# EAGLE board HW2_Brian Burton_u1038667 (EAGLE 9.6.2)
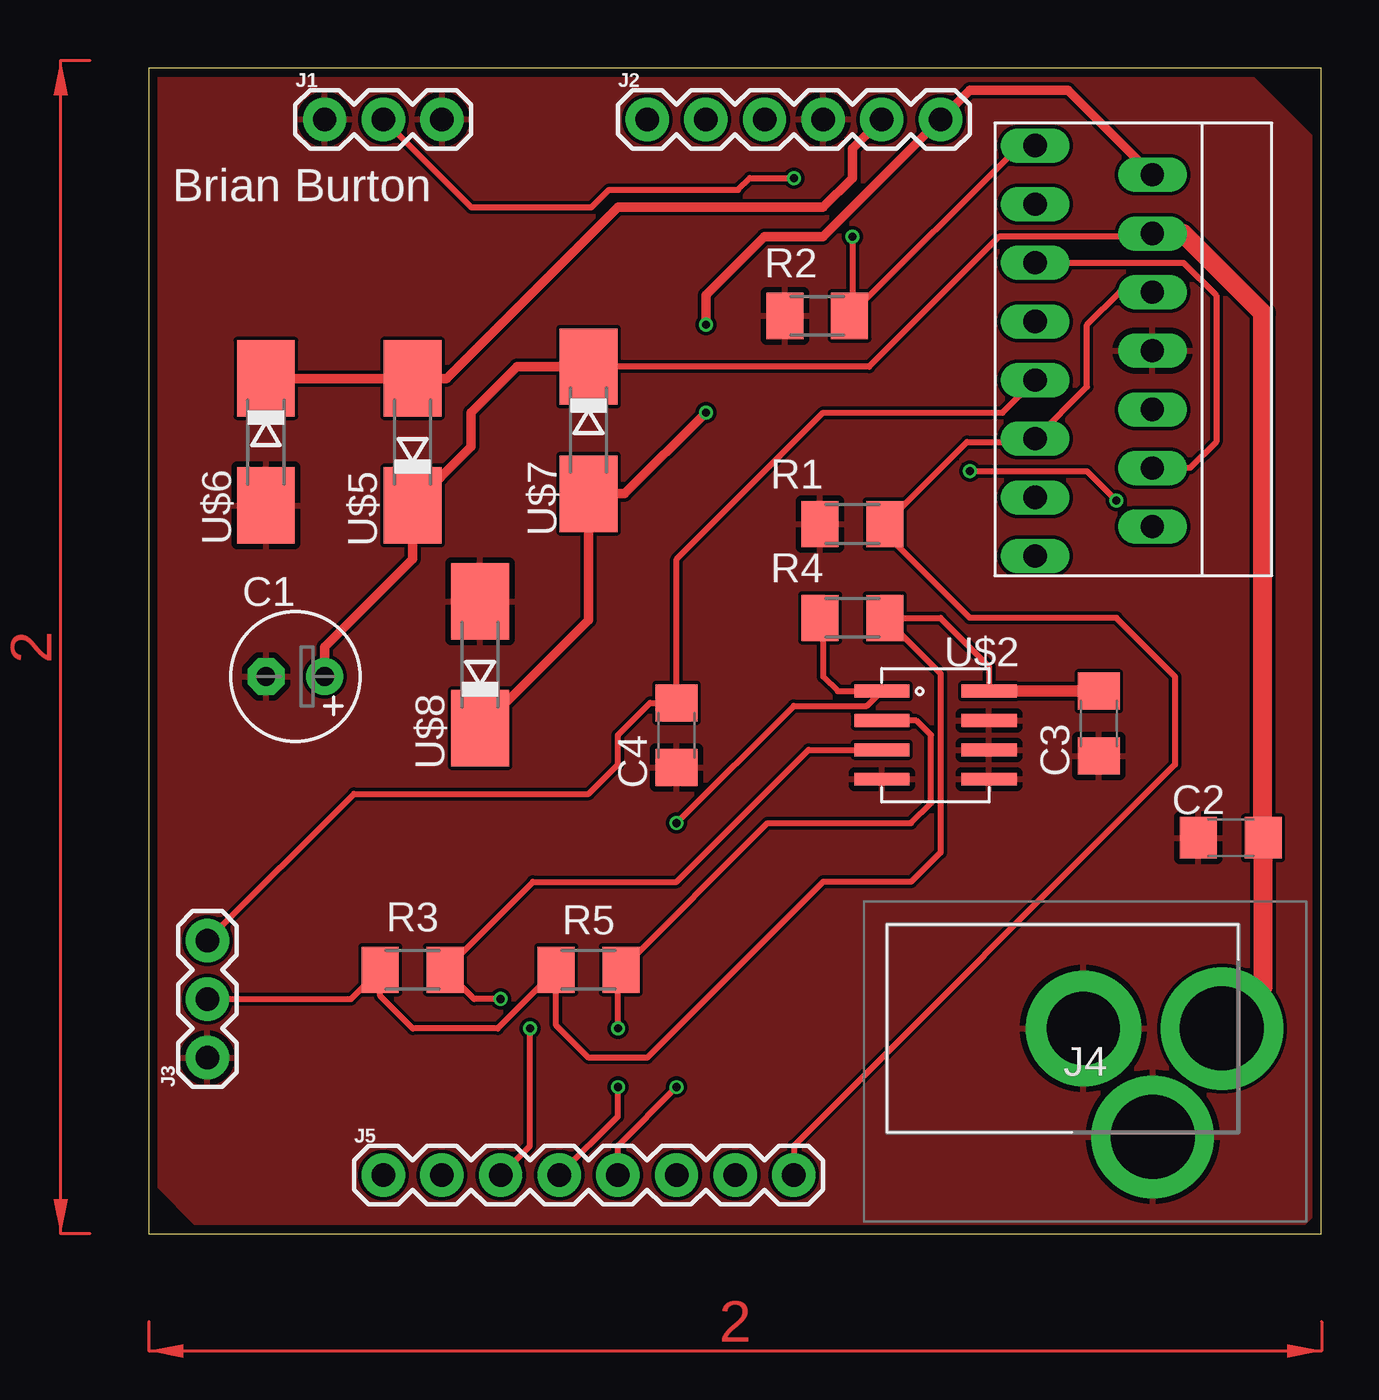
[diagram p0: board, top side]
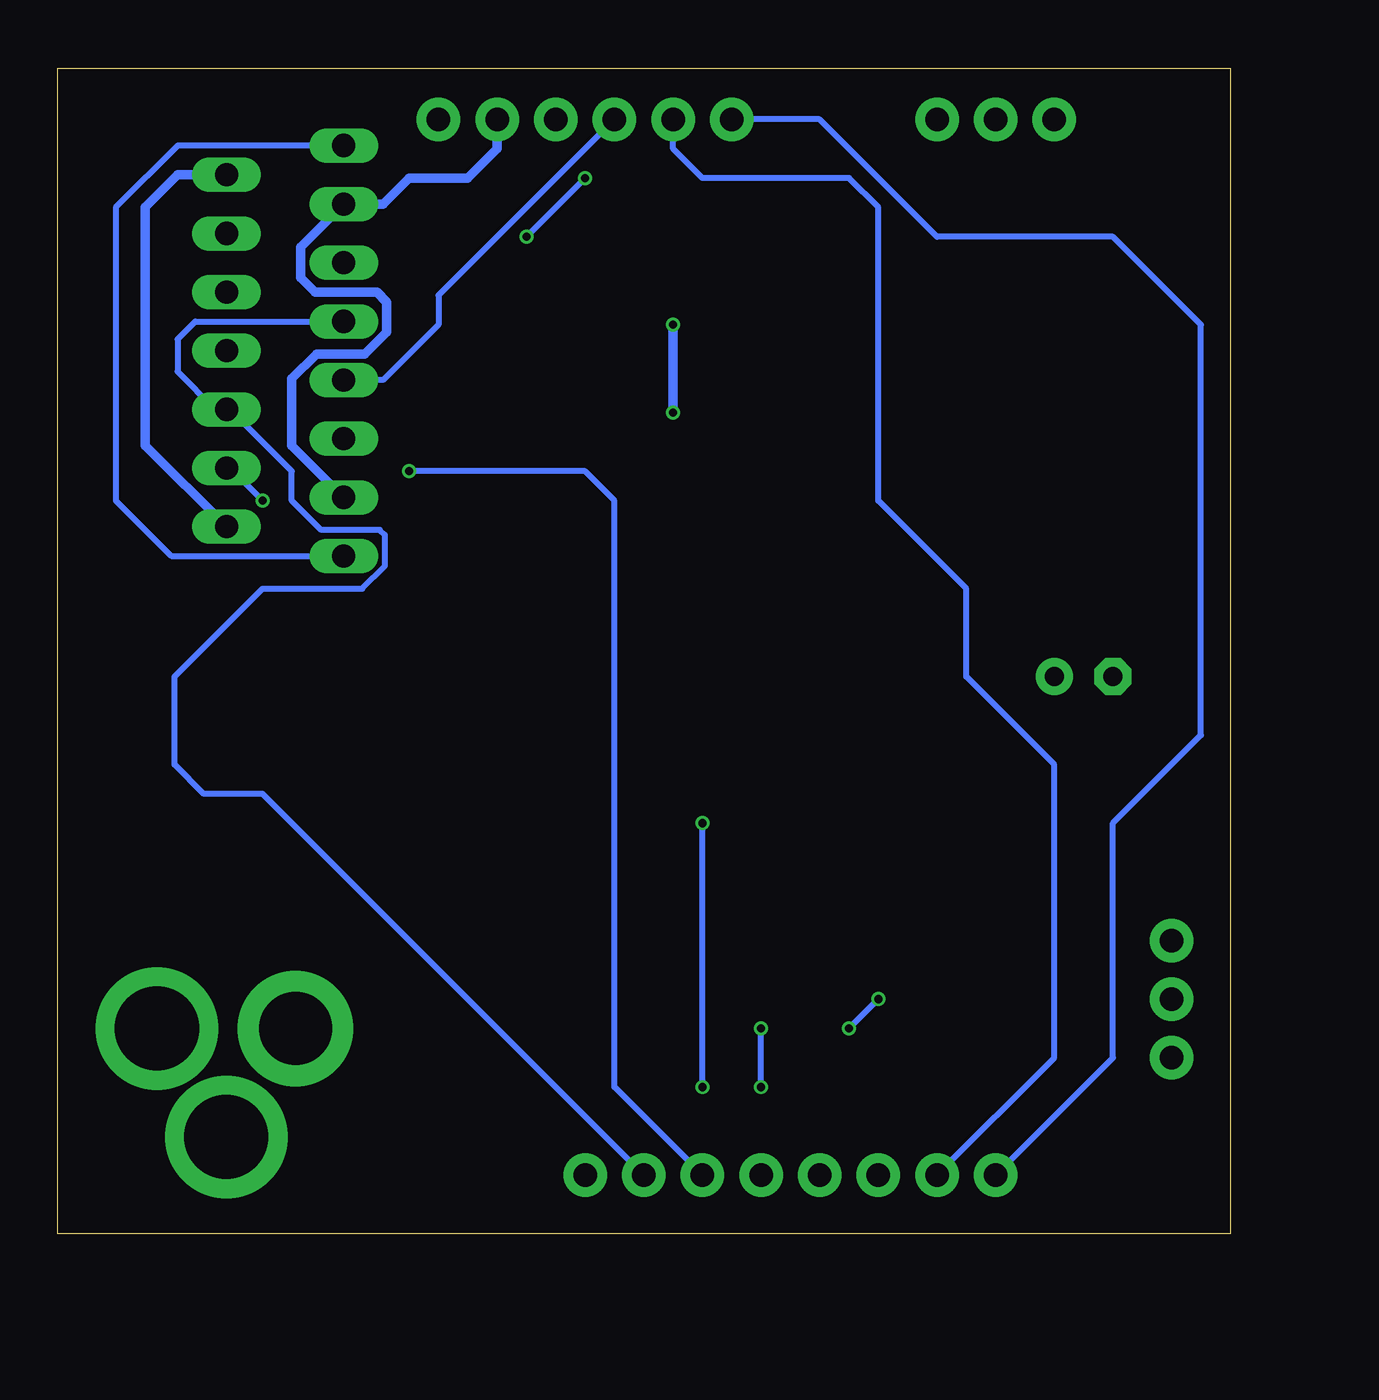
[diagram p1: board, bottom side, seen from below]

Size 50.78 x 50.47 mm. Coordinates in mm from the lower left corner, seen from the top.
Outline: 0,0 50.78,0 50.78,50.47 0,50.47 0,0
Copper layers (1*16): Top 0.035559375mm / dielectric 1.6mm / Bottom 0.035559375mm
Design rules "oshpark-2layer": minimum track width 6mil, minimum drill 10mil, track to track 6mil, track to pad 6mil, pad to pad 6mil, via to via 6mil, smd to smd 6mil, copper to edge 15mil, drill to drill 6mil, minimum pad ring 5mil, minimum via ring 5mil, stop-mask expansion 2.5mil, vias tented up to drill 0mil, thermal gap 10mil

## Footprints (pad centres in the part's own frame; a part is rotated, then mirrored left to right if it is on the bottom)
E2,5-6 = drill 0.813 pad 1.6: + -1.27,0 | drill 0.813 pad 1.6 octagon: - 1.27,0
C1206 = smd 1.6 x 1.8: 1 -1.4,0; 2 1.4,0
1X03 = drill 1.016 pad 1.88: 1 0,0; 2 2.54,0; 3 5.08,0
1X06 = drill 1.016 pad 1.88: 1 0,0; 2 2.54,0; 3 5.08,0; 4 7.62,0; 5 10.16,0; 6 12.7,0
CONSOCJ2155 = drill 3.64 pad 5.3: 1 0,0; 3 -3,-4.7 | drill 3.162 pad 5: 2 -6,0
1X08 = drill 1.016 pad 1.88: 1 0,0; 2 2.54,0; 3 5.08,0; 4 7.62,0; 5 10.16,0; 6 12.7,0; 7 15.24,0; 8 17.78,0
M1206 = smd 1.6 x 2: 1 -1.4,0; 2 1.4,0
L298N-MULTIWATT15 = drill 1 pad 1.2 long: 1 9.03,2.25; 2 7.76,-2.83; 3 6.49,2.25; 4 5.22,-2.83; 5 3.95,2.25; 6 2.68,-2.83; 7 1.41,2.25; 8 0.14,-2.83; 9 -1.13,2.25; 10 -2.4,-2.83; 11 -3.67,2.25; 12 -4.94,-2.83; 13 -6.21,2.25; 14 -7.48,-2.83; 15 -8.75,2.25
SOIC-8 = smd 2.388 x 0.559: 1 -2.54,1.905; 2 -2.54,0.635; 3 -2.54,-0.635; 4 -2.54,-1.905; 5 2.108,-1.905; 6 2.108,-0.635; 7 2.108,0.635; 8 2.108,1.905
SOD106A-W = smd 3.303 x 2.5: A 2.75,0; C -2.75,0

## Placement (x,y rotation side)
C1  1uF  [E2,5-6]  6.35,24.13 180 top
C2  100nF  [C1206]  46.86,17.14 180 top
C3  100nF  [C1206]  41.15,22.1 270 top
C4  100nF  [C1206]  22.86,21.59 270 top
J1  [1X03]  7.62,48.26 0 top
J2  MTR_CTRL  [1X06]  21.59,48.26 0 top
J3  MCU PWR  [1X03]  2.54,7.62 90 top
J4  CON-SOCJ-2155  [CONSOCJ2155]  46.48,8.89 0 top
J5  [1X08]  10.16,2.54 0 top
R1  10K  [M1206]  30.48,30.73 0 top
R2  0.04  [M1206]  28.96,39.75 180 top
R3  10K  [M1206]  11.43,11.43 180 top
R4  10K  [M1206]  30.48,26.67 0 top
R5  10K  [M1206]  19.05,11.43 180 top
U$1  L298N-MULTIWATT15  [L298N-MULTIWATT15]  40.64,38.1 90 top
U$2  LM75A-SOIC8  [SOIC-8]  34.29,21.59 0 top
U$5  SS14CT-ND  [SOD106A-W]  11.43,34.29 90 top
U$6  SS14CT-ND  [SOD106A-W]  5.08,34.29 270 top
U$7  SS14CT-ND  [SOD106A-W]  19.05,34.8 270 top
U$8  SS14CT-ND  [SOD106A-W]  14.35,24.64 90 top

## Library data of the parts
C1-C4 = rcl; SPICEPREFIX: C
J1 J3 = SparkFun-Connectors
J2 = SparkFun-Connectors; PROD_ID: CONN-08437
J4 = SamacSys_Parts; DESCRIPTION: DC Power Connectors Power Jack/Connector 2.1mm x 5.5mm; HEIGHT: 11mm; MANUFACTURER_NAME: Gravitech; MANUFACTURER_PART_NUMBER: CON-SOCJ-2155; MOUSER_PART_NUMBER: 992-CON-SOCJ-2155; MOUSER_PRICE-STOCK: https://www.mouser.co.uk/ProductDetail/Gravitech/CON-SOCJ-2155/?qs=fkzBJ5HM%252BdCcpvFQyQZHtA%3D%3D
J5 = SparkFun-Connectors; PROD_ID: CONN-08438
R1-R5 = rcl; SPICEPREFIX: R
U$1 = ECE5780-MotorDriver
U$2 U$5-U$8 = L298_Motor_Driver_Lib_ECE5780

## Nets
3.3V: C3.1 J3.2 R3.2 R4.2 R5.2 U$2.8
5V: C4.1 J2.3 J3.3 U$1.9
CS: J1.2 R2.1 U$1.1 U$1.15
ENABLE: J5.8 R1.2 U$1.6 U$1.11
ENC_A: J2.2 J5.2
ENC_B: J2.1 J5.1
GND: C1.- C2.2 C3.2 C4.2 J1.1 J1.3 J2.4 J3.1 J4.2 J4.3 R1.1 R2.2 U$1.8 U$2.4 U$2.5 U$2.6 U$2.7 U$6.A U$8.A
IN_1: J5.7 U$1.7 U$1.10
IN_2: J5.6 U$1.5 U$1.12
MTR_BLK: J2.5 U$1.3 U$1.13 U$5.A U$6.C
MTR_RED: J2.6 U$1.2 U$1.14 U$7.A U$8.C
O.S.: J5.3 R3.1 U$2.3
SCL: J5.4 R5.1 U$2.2
SDA: J5.5 R4.1 U$2.1
VCC: C1.+ C2.1 J4.1 U$1.4 U$5.C U$7.C

## Tracks (layer width: path | path; a pad name or v marks a point on that pad's centre or on a via)
3.3V
  Top 0.254: J3.2 8.76,10.16 R3.2 10.03,10.29 11.43,8.89 15.11,8.89 R5.2 17.65,9.02 19.05,7.62 21.59,7.62 29.21,15.24 33.02,15.24 34.29,16.51 34.29,24.26 R4.2 34.29,26.67 36.4,24.56 U$2.8
  Top 0.508: U$2.8 C3.1
5V
  Top 0.254: U$1.9 36.98,35.56 29.21,35.56 22.86,29.21 C4.1 21.72,22.99 20.32,21.59 20.32,20.32 19.05,19.05 8.89,19.05 J3.3
  Bottom 0.254: J2.3 34.29,40.64 34.29,39.37 36.69,36.97 U$1.9
CS  (via drill 0.35)
  Top 0.254: U$1.1 37.73,47.13 R2.1 30.48,39.88 v30.48,43.18 | J1.2 13.97,44.45 19.18,44.45 19.94,45.21 25.53,45.21 26.04,45.72 v27.94,45.72
  Bottom 0.254: U$1.1 45.58,47.13 48.26,44.45 48.26,31.75 45.86,29.35 U$1.15 | v27.94,45.72 v30.48,43.18
ENABLE
  Top 0.254: U$1.6 42.05,40.78 40.64,39.37 40.64,36.68 U$1.11 38.25,34.29 35.44,34.29 R1.2 31.88,30.35 35.56,26.67 41.91,26.67 44.45,24.13 44.45,20.32 27.94,3.81 J5.8
ENC_A
  Bottom 0.254: J5.2 7.62,7.62 7.62,20.32 11.43,24.13 11.43,27.94 15.24,31.75 15.24,44.45 16.51,45.72 22.86,45.72 24.13,46.99 J2.2
ENC_B
  Bottom 0.254: J5.1 5.08,7.62 5.08,17.78 1.27,21.59 1.27,39.37 5.08,43.18 12.7,43.18 17.78,48.26 J2.1
GND
  pour Top: 0,49.53 0,2.54 2.54,0 49.53,0 50.8,1.27 50.8,46.99 46.99,50.8 1.27,50.8
IN_1
  Bottom 0.254: U$1.7 44.82,39.51 45.59,38.73 45.59,37.34 43.95,35.7 U$1.10 43.32,35.7 40.64,33.02 40.64,31.75 39.37,30.48 36.83,30.48 36.61,30.26 36.61,28.92 37.59,27.94 41.91,27.94 45.72,24.13 45.72,20.32 44.45,19.05 41.91,19.05 J5.7
IN_2  (via drill 0.35)
  Top 0.254: U$1.5 44.82,42.05 46.23,40.64 46.23,34.29 45.1,33.16 U$1.12 | v35.56,33.02 40.64,33.02 v41.91,31.75
  Bottom 0.254: J5.6 26.67,6.35 26.67,31.75 27.94,33.02 v35.56,33.02 | v41.91,31.75 43.32,33.16 U$1.12
MTR_BLK
  Top 0.406: U$6.C U$5.A 12.91,37.04 20.32,44.45 29.21,44.45 30.48,45.72 30.48,46.99 J2.5
  Bottom 0.406: U$1.13 40.64,34.14 40.64,37.03 39.57,38.1 37.49,38.1 36.53,39.05 36.53,40.34 36.96,40.77 39.62,40.77 40.26,41.4 40.26,42.72 U$1.3 36.69,44.59 35.56,45.72 33.02,45.72 31.75,46.99 J2.5
MTR_RED  (via drill 0.35)
  Top 0.406: U$1.2 39.8,49.53 35.56,49.53 J2.6 29.21,43.18 26.67,43.18 24.13,40.64 v24.13,39.37 | U$8.C 19.05,26.59 U$7.A 20.62,32.05 v24.13,35.56
  Bottom 0.406: U$1.14 46.99,34.14 46.99,44.45 45.58,45.86 U$1.2 | v24.13,39.37 v24.13,35.56
O.S.  (via drill 0.35)
  Top 0.254: U$2.3 28.57,20.95 22.86,15.24 16.64,15.24 R3.1 14.1,10.16 v15.24,10.16 | J5.3 16.51,3.81 v16.51,8.89
  Bottom 0.254: v16.51,8.89 v15.24,10.16
SCL  (via drill 0.35)
  Top 0.254: U$2.2 33.25,22.23 33.88,21.59 33.88,18.64 33.02,17.78 26.8,17.78 R5.1 20.32,11.3 v20.32,8.89 | J5.4 20.32,5.08 v20.32,6.35
  Bottom 0.254: v20.32,6.35 v20.32,8.89
SDA  (via drill 0.35)
  Top 0.254: R4.1 29.21,26.54 29.21,24.13 29.84,23.5 U$2.1 31.11,22.86 27.94,22.86 v22.86,17.78 | J5.5 20.32,3.81 v22.86,6.35
  Bottom 0.254: v22.86,6.35 v22.86,17.78
VCC
  Top 0.254: U$1.4 43.33,43.18 36.83,43.18 31.2,37.55 U$7.C
  Top 0.406: C1.+ 7.62,25.4 11.43,29.21 U$5.C 13.97,34.08 13.97,35.56 15.96,37.55 U$7.C
  Top 0.813: J4.1 48.26,10.67 C2.1 48.26,17.18 48.26,39.86 44.8,43.32 U$1.4
(copper drawn outside any net)
  shapes: Top area x2

## Text on the board
tPlace: Brian Burton